# Altium PCB FLASHLIGHT_PCB.PcbDoc
Units mm, origin at the board's own origin, x right, y up, seen from the top; angles counter-clockwise.
Board outline 90.1 x 40 mm, 2 copper layers (Top Layer, Bottom Layer); 22 components, 14 nets, 81 pads, 30 vias.
Unrouted connection lines stored in the file: 25.
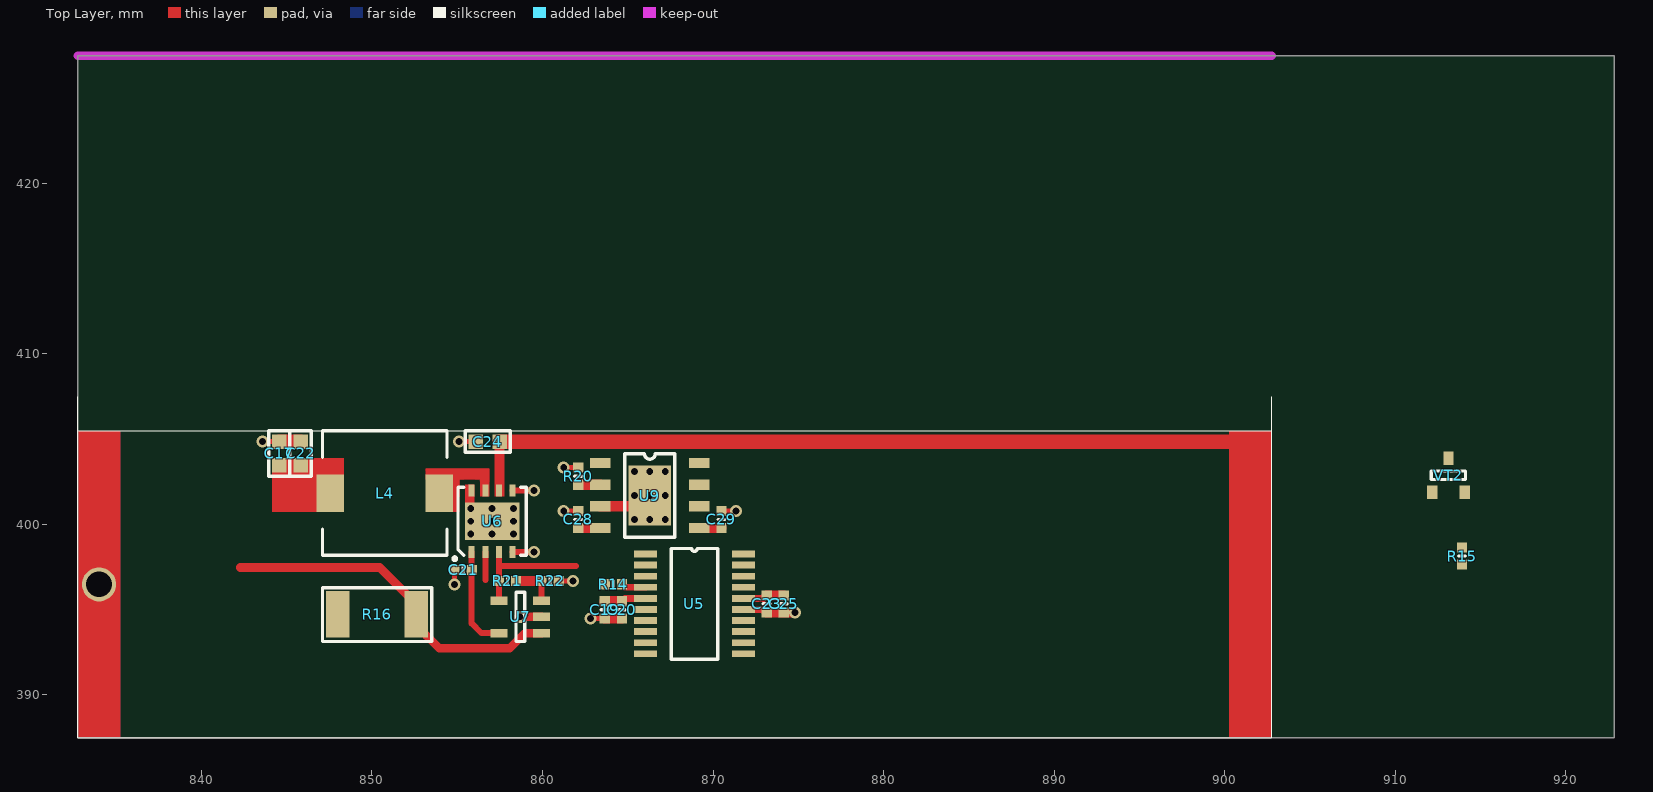
[diagram p0: Top Layer view]
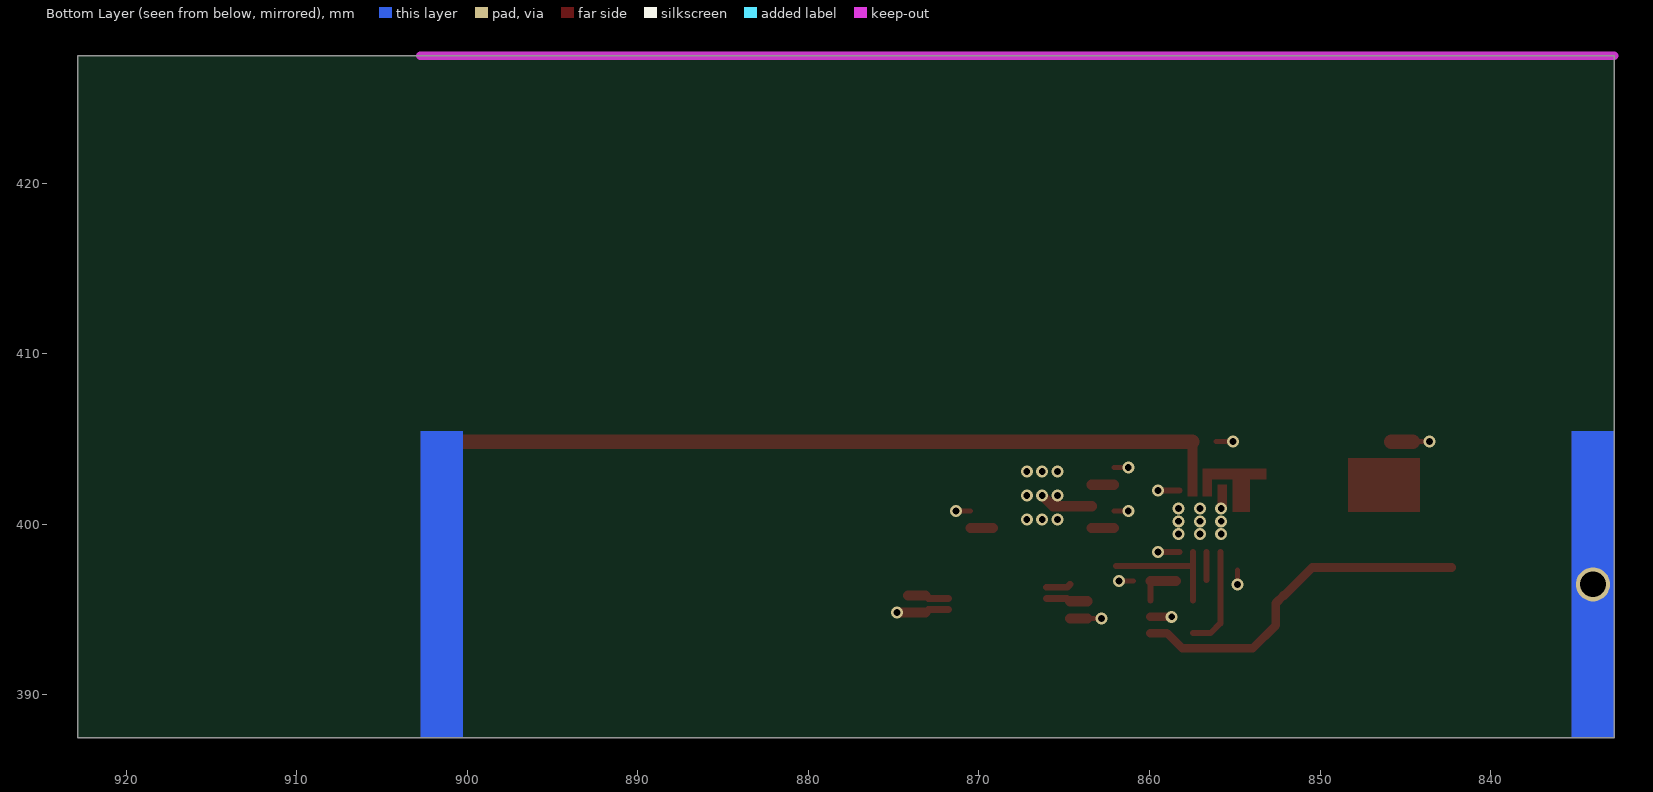
[diagram p1: Bottom Layer view, seen from below]
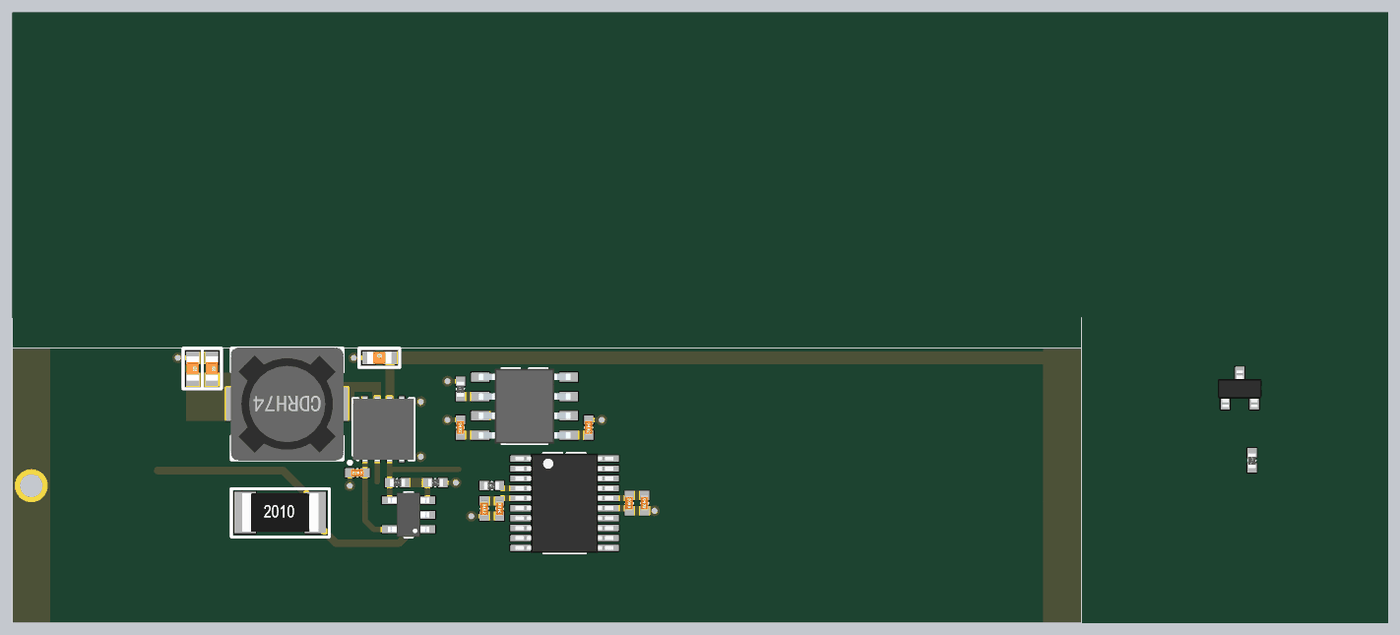
[diagram p2: 3D render of the assembled board from above, using the file's embedded part models]

## Layer stack, top to bottom
Top Solder: solder mask 0.0102, Solder Resist, Dk 3.5
Top Layer: signal copper 0.0356
Dielectric 1: dielectric 0.32, FR-4, Dk 4.8
Bottom Layer: signal copper 0.0356
Bottom Solder: solder mask 0.0102, Solder Resist, Dk 3.5

## Board outline
832.747,387.478 832.747,427.478 922.847,427.478 922.847,387.478

## Design rules (kind name [scope] priority, off if disabled: settings)
BoardOutlineClearance [All] p1: gap=0.3 ignorepadtopadclearanceinfootprint=FALSE
Clearance Clearance_Chips [(InComponent('U4') OR InComponent('U5'))] p1: gap=0.2 ignorepadtopadclearanceinfootprint=FALSE
Clearance Clearance_MultiLayerPad [OnLayer('Multi-Layer') and IsPad] p2: gap=0.3 ignorepadtopadclearanceinfootprint=FALSE except(0.4: Arc-THPad Track-THPad SMDPad-THPad THPad-THPad THPad-Via THPad-Fill THPad-Poly THPad-Region THPad-Text THPad-Hole)
Clearance Clearance_Polygon [InPolygon] p3: gap=0.3 ignorepadtopadclearanceinfootprint=FALSE except(0.4: THPad-Poly)
Clearance [All] p4: gap=0.2 ignorepadtopadclearanceinfootprint=TRUE except(0.3: Arc-SMDPad Arc-Via Track-SMDPad Track-Via SMDPad-SMDPad SMDPad-Via SMDPad-Fill SMDPad-Poly SMDPad-Region SMDPad-Text SMDPad-Hole; 0.4: Arc-THPad Track-THPad SMDPad-THPad THPad-THPad THPad-Via THPad-Fill THPad-Poly THPad-Region THPad-Text THPad-Hole)
ComponentClearance [All] p1: gap=0 collisioncheckmode=3 verticalgap=0 showdistances=FALSE
DiffPairsRouting [All] p1: maxlimit=0.3 minlimit=0.1 mostfreqgap=0.15 toplayer_minwidth=0.1 toplayer_maxwidth=0.3 toplayer_prefwidth=0.15 bottomlayer_minwidth=0.1 bottomlayer_maxwidth=0.3 bottomlayer_prefwidth=0.15 maxuncoupledlength=12.7
Height [All] p1: minheight=0 maxheight=50 prefheight=12.7
HoleSize [All] p1: absolutevalues=TRUE maxlimit=10 minlimit=0.3 maxpercent=80.000 minpercent=20.000
HoleToHoleClearance [All] p1: gap=0.3 allowstackedmicrovias=TRUE
MinimumSolderMaskSliver [All] p1: minsoldermaskwidth=0.005
PlaneClearance [All] p1: clearance=0.2
PlaneConnect [All] p1: planeconnectstyle=Relief reliefexpansion=0.2 reliefentries=4 reliefconductorwidth=0.3 reliefairgap=0.2
PolygonConnect PolygonConnect_PadGND [InNet('GND') and IsPad] p1: connectstyle=Relief reliefconductorwidth=0.3 reliefentries=4 polygonreliefangle="90 Angle" airgapwidth=0.2
PolygonConnect PolygonConnect_Via [IsVia] p2: connectstyle=Direct reliefconductorwidth=0.3 reliefentries=4 polygonreliefangle="90 Angle" airgapwidth=0.3
PolygonConnect [All] p3: connectstyle=Relief reliefconductorwidth=0.3 reliefentries=4 polygonreliefangle="90 Angle" airgapwidth=0.2
RoutingVias [All] p1: holewidth=0.4 width=0.7 viastyle="Through Hole" minholewidth=0.3 minwidth=0.7 maxholewidth=1 maxwidth=2
SilkToSolderMaskClearance [IsPad] p1: minsilkscreentomaskgap=0.05 clearancetoexposedcopper=TRUE
SolderMaskExpansion [All] p1: expansion=0.075 istentingtop=FALSE
Width [All] p1: maxlimit=10 minlimit=0.2 preferedwidth=0.3
21 further rules are at their usual default settings.

## Classes and differential pairs
component class U_LED_DRIVER: C17 C21 C22 C24 L4 R16 R21 R22 U6 U7
component class FLASHLIGHT_MAIN_SCH: C19 C20 C23 C25 C28 C29 R14 R15 R20 U5 U9 VT2

## Components (designator, comment, footprint, x,y, rotation, side; value= is the part's Value field where it differs from the comment)
C17 "Cap_0603" "CAP: 0603" 844.563,404.153 r270 top value=22μF
C19 "Cap_0402" "CAP: 0402" 863.656,394.983 r270 top value=1μF
C20 "Cap_0402" "CAP: 0402" 864.656,394.983 r90 top value=100nF
C21 "Cap_0402" "CAP: 0402" 855.348,397.328 r180 top value=0.1μF
C22 "Cap_0603" "CAP: 0603" 845.813,404.153 r270 top value=22μF
C23 "Cap_0402" "CAP: 0402" 873.15,395.333 r90 top value=100nF
C24 "Cap_0603" "CAP: 0603" 856.786,404.853 r0 top value=10μF
C25 "Cap_0402" "CAP: 0402" 874.15,395.333 r270 top value=1μF
C28 "Cap_0402" "CAP: 0402" 862.093,400.285 r270 top value=4.7μF
C29 "Cap_0402" "CAP: 0402" 870.493,400.285 r270 top value=4.7μF
L4 "CDRH74" CDRH74 850.748,401.828 r90 top value=2.2μH
R14 "" "RES: 0402" 864.156,396.483 r0 top value=10K
R15 "" "RES: 0402" 913.922,398.141 r90 top value=220R
R16 "Resistor_2512" "RES: 2010" 850.298,394.727 r0 top value=0.05R
R20 "" "RES: 0402" 862.093,402.825 r90 top value=1.2K
R21 "" "RES: 0402" 857.948,396.678 r180 top value=20K
R22 "" "RES: 0402" 860.448,396.678 r180 top value=20K
U5 "STM32L011F4P6TR" TSSOP-20 868.906,395.333 r0 top
U6 "ST1S10PUR" DFN8(4x4) 857.048,400.178 r90 top
U7 "MCP6001U" SOT-23-5 858.698,394.577 r270 top
U9 "TP4056" ESOP-8 866.293,401.69 r0 top
VT2 "IRLML6344" SOT-23-3 913.125,402.877 r0 top

## Footprints (in the part's own frame and the unit in brackets; to place one, negate y for a bottom-side part, rotate by r counter-clockwise, add the part's x,y. Pads: shape width x height; smd on the part's side, far side on the other; paste and mask are expansions set on the pad)
"CAP: 0402" [mm]
  rect 0.6x0.6 smd: 1(-0.5,0) 2(0.5,0)
  silkscreen extent 0,-0.2 0,0.2, body extent -0.52,-0.25 0.51,0.25, height 0.51
"CAP: 0603" [mm]
  rect 0.85x0.85 smd: 1(-0.7,0) 2(0.7,0)
  silkscreen extent -1.33,-0.63 1.33,0.63, body extent -0.8,-0.4 0.8,0.4, height 0.3
CDRH74 [mm] "CDRH74"
  rect 2.2x1.6 smd: 1(0,3.2) 2(0,-3.2)
  silkscreen extent -3.65,-3.65 3.65,3.65, body extent -3.7,-3.7 3.7,3.7, height 4.18
DFN8(4x4) [mm] "DFN8(4x4)"
  rect 0.7x0.35 smd: 1(-1.8,1.2) 2(-1.8,0.4) 3(-1.8,-0.4) 4(-1.8,-1.2) 5(1.8,-1.2) 6(1.8,-0.4) 7(1.8,0.4) 8(1.8,1.2)
  rect 2.2x3.2 smd: 9(0,0)
  silkscreen extent -2.29,-2 2,2.29, body extent -2.05,-2 2.05,2, height 1.01
ESOP-8 [mm] "ESOP-8"
  rect 1.2x0.6 smd: 1(-2.9,1.905) 2(-2.9,0.635) 3(-2.9,-0.635) 4(-2.9,-1.905) 5(2.9,-1.905) 6(2.9,-0.635) 7(2.9,0.635) 8(2.9,1.905)
  rect 2.5x3.5 smd: 9(0,0)
  silkscreen extent -1.47,-2.45 1.47,2.45, body extent -3,-2.45 3,2.45, height 1.76
"RES: 0402" [mm]
  rect 0.6x0.6 smd: 1(-0.5,0) 2(0.5,0)
  silkscreen extent 0,-0.2 0,0.2, body extent -0.52,-0.25 0.47,0.25, height 0.34
"RES: 2010" [mm]
  rect 1.4x2.7 smd: 1(-2.3,0) 2(2.3,0)
  silkscreen extent -3.2,-1.6 3.2,1.55, body extent -2.5,-1.25 2.5,1.25, height 0.6
SOT-23-3 [mm] "SOT-23-3"
  rect 0.6x0.8 smd: 1(-0.95,-1) 2(0.95,-1) 3(0,1)
  silkscreen extent -1,-0.25 1,0.25, body extent -1.45,-1.25 1.45,1.15, height 0.96
SOT-23-5 [mm] "SOT-23-5"
  rect 0.5x1 smd: 1(0.95,1.25) 2(0,1.25) 3(-0.95,1.25) 4(-0.95,-1.25) 5(0.95,-1.25)
  silkscreen extent -1.45,-0.25 1.45,0.25, body extent -1.45,-1.35 1.45,1.35, height 1.46
TSSOP-20 [mm]
  rect 1.35x0.4 smd: 1(-2.875,2.925) 2(-2.875,2.275) 3(-2.875,1.625) 4(-2.875,0.975) 5(-2.875,0.325) 6(-2.875,-0.325) 7(-2.875,-0.975) 8(-2.875,-1.625) 9(-2.875,-2.275) 10(-2.875,-2.925) 11(2.875,-2.925) 12(2.875,-2.275) 13(2.875,-1.625) 14(2.875,-0.975) 15(2.875,-0.325) 16(2.875,0.325) 17(2.875,0.975) 18(2.875,1.625) 19(2.875,2.275) 20(2.875,2.925)
  silkscreen extent -1.36,-3.25 1.37,3.25, body extent -3.2,-3.25 3.2,3.25, height 1.21

## Part data
C17 C22 C24: Package/Case=0603, Temperature=-55...+125°C(-55...+85°C), TypeDielectric=X7R(X5R), Voltage=??V, Product Category=Capacitors
C19 C20 C21 C23 C25: Package/Case=0402, Temperature=-55...+125°C(-55...+85°C), TypeDielectric=X7R(X5R), Voltage=??V, Product Category=Capacitors
C28 C29: Package/Case=0402, Temperature=-55...+125°C(-55...+85°C), TypeDielectric=X7R(X5R), Voltage="X5R 6.3В 20%", Product Category=Capacitors
L4: "SMD Power Inductor", Manufacturer=SUMIDA, Datasheet=https://radiokomponent.com.ua/pdf/trans/CDRH74.pdf, HelpURL=https://aliexpress.ru/item/1005004321960425.html?sku_id=12000028751500104&spm=a2g2w.productlist.search_results.7.529b6cc4mPaVds, Product Category=Inductors
R14 R15 R20 R21 R22: library part Resistor_0402, Package/Case=0402, Temperature=-55...+125°C, Tolerance=±5%, Product Category=Resistors
R16: library part Resistor_2010, Package/Case=2010, Temperature=-55...+125°C, Tolerance=±5%, Product Category=Resistors
U5: Manufacturer=STMicroelectronics, Package/Case=TSSOP-20, Datasheet=https://static.chipdip.ru/lib/696/DOC011696872.pdf, HelpURL=https://www.chipdip.by/product0/8007122304, Product Category=Microcontrollers
U6: "Step-down current mode PWM regulator", Manufacturer=STMicroelectronics, Package/Case="DFN8 (4x4)", Datasheet=https://static.chipdip.ru/lib/421/DOC025421412.pdf, HelpURL=https://www.chipdip.by/product/st1s10pur, Product Category="PWM regulators"
U7: "1 MHz, Low-Power Op Amp", Manufacturer=Microchip, Package/Case=SOT-23-5, Datasheet=https://eu.mouser.com/ProductDetail/Microchip-Technology-Atmel/MCP6004-I-SL?qs=n%2FfJlMG9rCZ2%2F%2FCryvZ52w%3D%3D, HelpURL=https://eu.mouser.com/ProductDetail/Microchip-Technology-Atmel/MCP6001UT-I-OT?qs=Sez7gRs8XSU2iw24kVuIOw%3D%3D, Product Category="Operational Amplifiers"
U9: "1s charge module", Manufacturer=UMW, Package/Case=ESOP-8, Datasheet=https://static.chipdip.ru/lib/848/DOC018848830.pdf, HelpURL=https://www.chipdip.by/product/tp4056-umw, Product Category="Charge modules"
VT2: "MOSFET N-CHANNEL 30V 5A", Manufacturer=Fairchild, Package/Case=SOT-23, Analogue=NX7002AK, Datasheet=https://static.chipdip.ru/lib/015/DOC024015069.pdf, HelpURL=https://eu.mouser.com/ProductDetail/onsemi-Fairchild/2N7002?qs=0dwsXDNhqlz66WJJhrTFjQ%3D%3D, Product Category=MOSFET

## Free pads (board coordinates)
  round 2 hole 1.5: ""(833.997,396.478)

## Via types
v1: diameter 0.7, hole 0.4, Top Layer to Bottom Layer, tented both sides, 30 vias

## Nets (pads, with @x,y where several pads share a name; then routed paths per layer and width w, separated by ;. In a path a pad name is that pad's centre, name@x,y a point inside that pad or via, vN(x,y) a via of type N, cw(c..) or ccw(c..) an arc to the next point about the centre after c; other vN are vias at no path point)
+2V5: C19.1 C20.2 C23.2 C25.1 R14.1 U5.5 U5.16 | length 4.9
  Top Layer w0.4: C20.2 864.831,395.658 U5.5 ; U5.16 872.975,395.658 C23.2
  Top Layer w0.6: C19.1 C20.2 ; C23.2 C25.1
+5V: C28.2 U9.4 | length 1.3
  Top Layer w0.6: C28.2 U9.4
AMP+: R16.2 U7.1 | length 20.8
  Top Layer w0.5: 842.282,397.469 850.462,397.469 852.104,395.827 852.148,395.827 852.598,395.377 852.598,394.077 853.955,392.721 858.07,392.721 858.976,393.627 U7.1
GND: C17.1 C19.2 C20.1 C21.2 C22.1 C23.1 C24.1 C25.2 C28.1 C29.1 pad. R16.1 R20.2 R22.1 U5.1 U5.15 U6.4 U6.5 U6.8 U6.9 U7.2 U9.3 U9.9 VT2.2 | length 19.3
  Top Layer w0.3: v1(843.588,404.853) C17.1 ; v1(854.848,396.478) C21.2 ; v1(855.111,404.853) C24.1 ; R22.1 v1(861.798,396.678) ; v1(861.243,400.785) C28.1 ; v1(861.243,403.325) R20.2 ; v1(862.806,394.483) C19.2 ; C29.1 v1(871.343,400.785)
  Top Layer w0.35: U6.4 v1(859.498,398.378) ; U6.5 v1(859.498,401.978)
  Top Layer w0.4: U5.15 872.975,395.008 C23.1
  Top Layer w0.5: v1(858.698,394.577) U7.2
  Top Layer w0.6: U9.3 865.658,401.055 v1(866.293,401.69) ; C19.2 C20.1 ; C23.1 C25.2 v1(874.8,394.833)
  Top Layer w0.85: C17.1 C22.1
  other v1: 855.798,399.428 857.048,399.428 858.298,399.428 855.798,400.178 857.048,400.178 858.298,400.178 865.393,400.29 866.293,400.29 867.193,400.29 855.798,400.928 857.048,400.928 858.298,400.928 865.393,401.69 867.193,401.69 865.393,403.09 866.293,403.09 867.193,403.09
LED_DRIVER_EN: U6.2 | length 1.6
  Top Layer w0.35: 856.648,396.741 U6.2
NetC17_2: C17.2 C22.2 L4.1 | length 1.3
  Top Layer w0.85: C17.2 C22.2
NetL4_2: L4.2 U6.7
NetR14_2: R14.2 U5.4 | length 1.4
  Top Layer w0.4: R14.2 864.831,396.308 U5.4
NetR15_1: R15.1 VT2.1
NetR20_1: R20.1 U9.2 | length 1.3
  Top Layer w0.6: R20.1 U9.2
NetR21_1: R21.1 R22.2 U7.3 | length 2.7
  Top Layer w0.35: U7.3 R22.2
  Top Layer w0.6: R21.1 R22.2
TP4056_EN: U9.8
VFB: R21.2 U6.3 U7.4 | length 7.4
  Top Layer w0.35: U7.4 R21.2 857.448,397.553 ; U6.3 857.448,397.553 ; 861.971,397.553 857.448,397.553
VIN: C21.1 C24.2 C29.2 U6.1 U6.6 U7.5 U9.5 | length 51.7
  Top Layer w0.35: U6.1 C21.1 855.848,394.193 856.414,393.627 U7.5
  Top Layer w0.575: 901.222,402.916 901.593,402.545
  Top Layer w0.6: U9.5 C29.2
  Top Layer w0.85: C24.2 901.318,404.853
pads on no net: R15.2 U5.2 U5.3 U5.6 U5.7 U5.8 U5.9 U5.10 U5.11 U5.12 U5.13 U5.14 U5.17 U5.18 U5.19 U5.20 U9.1 U9.6 U9.7 VT2.3

## Polygon pours and split planes (outlines as drawn)
NetL4_2 on Top Layer "NONET_L-01_P-001" (solid, pour order 104): 853.148,401.628 856.898,401.628 856.898,403.278 853.148,403.278

## Keep-outs
Keep-Out Layer:
  lines w0.5: 832.747,427.478 902.747,427.478

## Other copper
Top Layer:
  rectangle net NetL4_2: 856.323,401.628 856.898,402.878
  region net NetL4_2: 856.898,402.628 856.898,403.278 853.148,403.278 853.148,402.628
  region net NetC17_2: 846.748,403.878 846.748,401.828 848.348,401.828 848.348,403.878
  rectangle net NetC17_2: 844.138,400.728 848.348,403.878
  rectangle net NetL4_2: 854.098,400.728 855.142,403.278
  rectangle net VIN: 857.198,401.628 857.773,404.853
  rectangle net GND: 855.448,400.974 856.023,402.328
  rectangle net VIN: 900.247,387.478 902.747,405.478
  rectangle net GND: 832.747,387.478 835.247,405.478
  pour cut-out: 855.142,402.628 855.142,401.828 855.448,401.828 855.448,402.628
Bottom Layer:
  rectangle net VIN: 900.247,387.478 902.747,405.478
  rectangle net GND: 832.747,387.478 835.247,405.478

## Silkscreen, mask and mechanical layers (free items; w line width, h text height)
Top Overlay:
  lines w0.05: 832.747,407.478 832.747,387.478 902.747,387.478 902.747,407.478 ; 902.747,405.478 832.747,405.478 ; 832.747,405.478 832.747,405.478
Mechanical 3:
  lines w0.05: 832.296,405.478 835.247,405.478 835.247,387.478 900.247,387.478 900.247,405.478 903.071,405.478 ; 832.747,387.478 832.747,390.478 836.247,390.478 ; 832.747,397.037 832.747,396.478 835.247,396.478 ; 843.908,393.296 844.077,393.127 858.948,393.127 ; 846.644,398.178 847.098,398.178 847.098,397.787 ; 847.098,398.468 847.098,390.465 847.336,390.227 ; 850.761,403.216 850.824,403.278 853.148,403.278 ; 851.148,402.928 851.148,403.713 ; 851.442,398.378 855.848,398.378 ; 852.946,397.882 853.442,398.378 ; 855.848,397.628 855.848,398.028 ; 856.348,397.578 856.373,397.553 ; 856.498,397.553 858.423,397.553 ; 857.148,395.527 858.148,395.527 ; 857.198,401.628 857.773,401.628 ; 857.448,395.817 857.448,398.728 ; 857.448,395.962 857.448,394.49 857.494,394.444 ; 857.486,401.628 857.486,406.339 857.707,406.561 ; 858.448,396.678 860.835,396.678 ; 859.013,404.853 859.023,404.844 ; 859.948,395.527 859.948,397.081 ; 869.793,399.785 870.193,399.785
Mechanical 15:
  lines w0.05: 874.37,410.491 882.74,410.491 ; 877.658,394.458 877.658,416.003 ; 879.908,420.128 880.458,420.128 ; 880.458,418.728 880.458,419.278